# EAGLE board XOR gateed (EAGLE 6.5.0)
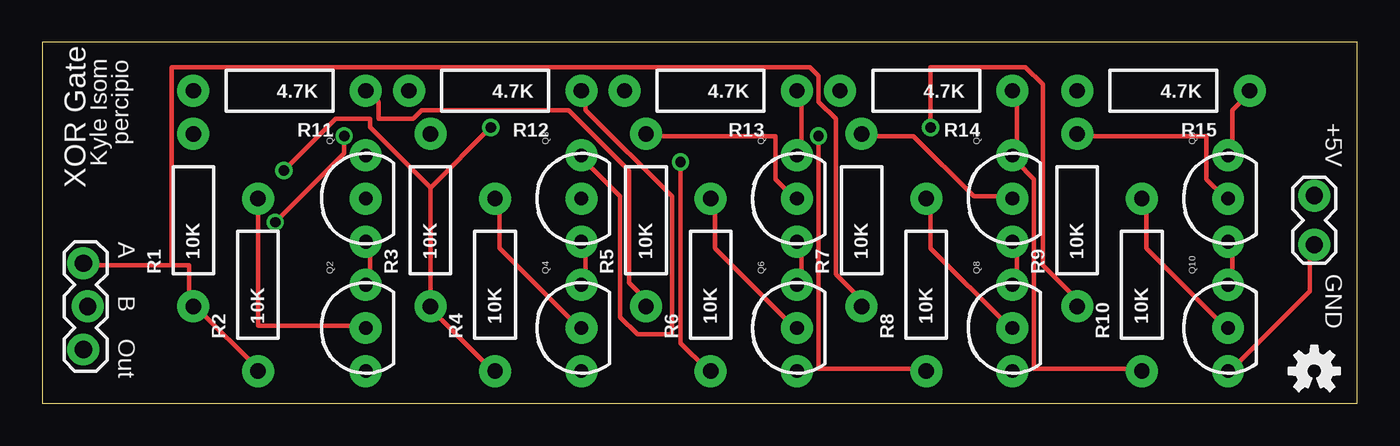
[diagram p0: board, top side]
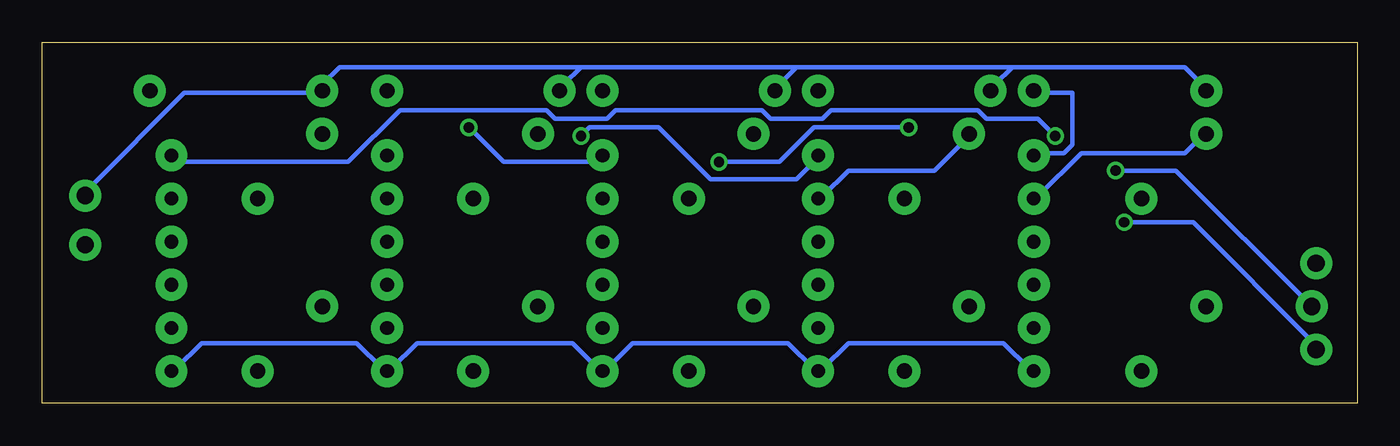
[diagram p1: board, bottom side, seen from below]

Size 77.45 x 21.26 mm. Coordinates in mm from the lower left corner, seen from the top.
Outline: 0,0 77.45,0 77.45,21.26 0,21.26 0,0
Copper layers (1*16): Top 0.035mm / dielectric 1.5mm / Bottom 0.035mm
Design rules "default": minimum track width 10mil, minimum drill 24mil, track to track 8mil, track to pad 8mil, pad to pad 8mil, via to via 8mil, smd to smd 8mil, copper to edge 40mil, drill to drill 8mil, minimum pad ring 10mil, minimum via ring 8mil, stop-mask expansion 4mil, vias tented up to drill 0mil, thermal gap 10mil

## Footprints (pad centres in the part's own frame; a part is rotated, then mirrored left to right if it is on the bottom)
1X03_LOCK = drill 1.016 pad 1.88: 1 0,0.127; 2 2.54,-0.127; 3 5.08,0.127
1X02_LOCK = drill 1.016 pad 1.88: 1 -0.178,0; 2 2.718,0
TO-92-AMMO = drill 0.813 pad 1.88: 1 -2.54,0; 2 0,0; 3 2.54,0
AXIAL-0.4 = drill 0.9 pad 1.88: P$1 -5.08,0; P$2 5.08,0

## Placement (x,y rotation side)
FRAME1  FRAME-LETTER  [CREATIVE_COMMONS]  19.05,-10.16 0 top  (outside the outline)
JP1  I/O  [1X03_LOCK]  2.54,3.17 90 top
JP2  M02LOCK  [1X02_LOCK]  74.93,9.53 90 top
LOGO1  OSHW-LOGOS  [OSHW-LOGO-S]  74.93,1.91 0 top
Q1  2N2222  [TO-92-AMMO]  19.05,12.06 90 top
Q2  2N2222  [TO-92-AMMO]  19.05,4.45 90 top
Q3  2N2222  [TO-92-AMMO]  31.75,12.06 90 top
Q4  2N2222  [TO-92-AMMO]  31.75,4.45 90 top
Q5  2N2222  [TO-92-AMMO]  44.45,12.06 90 top
Q6  2N2222  [TO-92-AMMO]  44.45,4.45 90 top
Q7  2N2222  [TO-92-AMMO]  57.15,12.06 90 top
Q8  2N2222  [TO-92-AMMO]  57.15,4.45 90 top
Q9  2N2222  [TO-92-AMMO]  69.85,12.06 90 top
Q10  2N2222  [TO-92-AMMO]  69.85,4.45 90 top
R1  10K  [AXIAL-0.4]  8.89,10.79 90 top
R2  10K  [AXIAL-0.4]  12.7,6.99 90 top
R3  10K  [AXIAL-0.4]  22.86,10.79 90 top
R4  10K  [AXIAL-0.4]  26.67,6.99 90 top
R5  10K  [AXIAL-0.4]  35.56,10.79 90 top
R6  10K  [AXIAL-0.4]  39.37,6.99 90 top
R7  10K  [AXIAL-0.4]  48.26,10.79 90 top
R8  10K  [AXIAL-0.4]  52.07,6.99 90 top
R9  10K  [AXIAL-0.4]  60.96,10.79 90 top
R10  10K  [AXIAL-0.4]  64.77,6.99 90 top
R11  4.7K  [AXIAL-0.4]  13.97,18.41 180 top
R12  4.7K  [AXIAL-0.4]  26.67,18.41 180 top
R13  4.7K  [AXIAL-0.4]  39.37,18.41 180 top
R14  4.7K  [AXIAL-0.4]  52.07,18.41 180 top
R15  4.7K  [AXIAL-0.4]  66.04,18.41 180 top

## Library data of the parts
FRAME1 LOGO1 = SparkFun-Aesthetics
JP1 JP2 = SparkFun-Connectors
Q1-Q10 = SparkFun-DiscreteSemi
R1-R15 = SparkFun-Passives

## Nets
GND: JP2.1 Q2.1 Q4.1 Q6.1 Q8.1 Q10.1
N$1: Q1.2 R1.P$2
N$2: Q2.2 R2.P$2
N$3: Q3.2 R3.P$2
N$4: Q4.2 R4.P$2
N$5: Q5.2 R5.P$2
N$6: Q6.2 R6.P$2
N$7: Q7.2 R7.P$2
N$8: Q8.2 R8.P$2
N$9: Q9.2 R9.P$2
N$10: Q10.2 R10.P$2
N$11: Q1.3 R5.P$1 R11.P$1
N$12: Q3.3 R8.P$1 R12.P$1
N$13: Q5.3 R9.P$1 R13.P$1
N$14: Q7.3 R10.P$1 R14.P$1
N$15: JP1.1 Q9.3 R15.P$1
N$16: Q1.1 Q2.3
N$17: Q5.1 Q6.3
N$18: Q3.1 Q4.3
N$19: Q7.1 Q8.3
N$20: Q9.1 Q10.3
N$21: JP1.3 R1.P$1 R2.P$1 R7.P$1
N$22: JP1.2 R3.P$1 R4.P$1 R6.P$1
VCC: JP2.2 R11.P$2 R12.P$2 R13.P$2 R14.P$2 R15.P$2

## Tracks (layer width: path | path; a pad name or v marks a point on that pad's centre or on a via)
GND
  Top 0.254: Q10.1 70.1,2.03 74.68,6.6 74.68,9.14 JP2.1
  Bottom 0.254: Q2.1 19.3,2.03 20.83,3.56 29.97,3.56 31.5,2.03 Q4.1 32,2.03 33.53,3.56 42.67,3.56 44.2,2.03 Q6.1 44.7,2.03 46.23,3.56 55.37,3.56 56.9,2.03 Q8.1 57.4,2.03 58.93,3.56 68.07,3.56 69.6,2.03 Q10.1
N$1
  Bottom 0.254: R1.P$2 9.14,15.75 10.16,14.73 16.26,14.73 18.8,12.19 Q1.2
N$2
  Top 0.254: R2.P$2 12.7,4.57 18.8,4.57 Q2.2
N$3
  Bottom 0.254: R3.P$2 22.86,15.75 24.89,13.72 29.97,13.72 31.5,12.19 Q3.2
N$4
  Top 0.254: Q4.2 31.5,4.57 26.92,9.14 26.92,11.68 R4.P$2
N$5
  Top 0.254: R5.P$2 35.56,15.75 43.18,15.75 43.18,13.21 44.2,12.19 Q5.2
N$6
  Top 0.254: Q6.2 44.2,4.57 39.62,9.14 39.62,11.68 R6.P$2
N$7
  Top 0.254: R7.P$2 48.26,15.75 51.31,15.75 54.86,12.19 56.9,12.19 Q7.2
N$8
  Top 0.254: Q8.2 56.9,4.57 52.32,9.14 52.32,11.68 R8.P$2
N$9
  Top 0.254: R9.P$2 60.96,15.75 68.58,15.75 68.58,13.21 69.6,12.19 Q9.2
N$10
  Top 0.254: Q10.2 69.6,4.57 65.02,9.14 65.02,11.68 R10.P$2
N$11
  Top 0.254: R5.P$1 35.56,6.1 34.54,7.11 34.54,13.72 30.99,17.27 22.35,17.27 21.84,16.76 19.81,16.76 19.81,17.78 19.3,18.29 R11.P$1
  Bottom 0.254: Q1.3 18.8,14.73 17.27,14.73 16.76,15.24 16.76,18.29 18.8,18.29 R11.P$1
N$12  (via drill 0.61)
  Top 0.254: Q3.3 32,14.22 34.04,12.19 34.04,5.08 35.05,4.06 37.08,4.06 37.08,12.19 32,17.27 32,18.29 R12.P$1 | v45.72,15.75 45.72,2.03 51.82,2.03 R8.P$1
  Bottom 0.254: v45.72,15.75 45.21,16.26 41.15,16.26 38.1,13.21 33.02,13.21 32,14.22 Q3.3
N$13  (via drill 0.61)
  Top 0.254: Q5.3 44.7,14.73 44.7,18.29 R13.P$1 | v52.32,16.26 52.32,19.81 57.91,19.81 58.93,18.8 58.93,8.13 60.96,6.1 R9.P$1
  Bottom 0.254: v52.32,16.26 50.29,14.22 44.7,14.22 Q5.3
N$14
  Top 0.254: R14.P$1 57.4,18.29 57.4,14.73 Q7.3 57.4,14.22 58.42,13.21 58.42,2.03 64.52,2.03 R10.P$1
N$15  (via drill 0.61)
  Top 0.254: v13.72,10.67 17.78,14.73 v17.78,15.75 | R15.P$1 71.12,18.29 70.1,17.27 70.1,14.73 Q9.3
  Bottom 0.254: v13.72,10.67 9.65,10.67 2.54,3.56 JP1.1 | v17.78,15.75 18.8,16.76 21.84,16.76 22.35,17.27 30.99,17.27 31.5,16.76 34.54,16.76 35.05,17.27 43.69,17.27 44.2,16.76 47.24,16.76 47.75,17.27 56.39,17.27 59.44,14.22 69.6,14.22 Q9.3
N$16
  Top 0.254: Q2.3 19.3,7.11 19.3,9.14 Q1.1
N$17
  Top 0.254: Q6.3 44.7,7.11 44.7,9.14 Q5.1
N$18
  Top 0.254: Q4.3 32,7.11 32,9.14 Q3.1
N$19
  Top 0.254: Q8.3 57.4,7.11 57.4,9.14 Q7.1
N$20
  Top 0.254: Q10.3 70.1,7.11 70.1,9.14 Q9.1
N$21
  Top 0.254: 7.62,8.13 8.64,8.13 8.64,6.1 R1.P$1 9.14,5.59 12.7,2.03 R2.P$1 | 7.62,8.13 2.54,8.13 JP1.3 | 7.62,8.13 7.62,19.81 45.21,19.81 45.72,19.3 45.72,17.78 46.74,16.76 46.74,7.62 48.26,6.1 R7.P$1
N$22  (via drill 0.61)
  Top 0.254: v14.22,13.72 17.27,16.76 19.3,16.76 19.3,16.26 22.86,12.7 | 22.86,12.7 R3.P$1 22.86,5.59 26.42,2.03 R4.P$1 | v37.59,14.22 37.59,3.56 39.12,2.03 R6.P$1 | 22.86,12.7 v26.42,16.26
  Bottom 0.254: JP1.2 10.67,13.72 v14.22,13.72 | v37.59,14.22 34.04,14.22 32,16.26 v26.42,16.26
VCC
  Bottom 0.254: 20.32,19.81 10.16,19.81 9.14,18.8 R11.P$2 | 20.32,19.81 21.34,18.8 R12.P$2 | 33.02,19.81 34.04,18.8 R13.P$2 | 20.32,19.81 33.02,19.81 | 45.72,19.81 46.74,18.8 R14.P$2 | 33.02,19.81 45.72,19.81 | 45.72,19.81 59.94,19.81 60.96,18.8 R15.P$2 60.96,18.29 69.09,18.29 74.68,12.7 JP2.2

## Text on the board
tPlace: +5V | percipio | Kyle Isom | XOR Gate | A | GND | B | Out